# Altium PCB 82230KPC-1-K-1V0-241216.PcbDoc (part 2 of 2)
Units mm, origin at the board's own origin, x right, y up, seen from the top; angles counter-clockwise.
Board outline 63.4 x 81.4 mm, 2 copper layers (Top Layer, Bottom Layer); 105 components, 68 nets, 293 pads, 137 vias.
Unrouted connection lines stored in the file: 29.
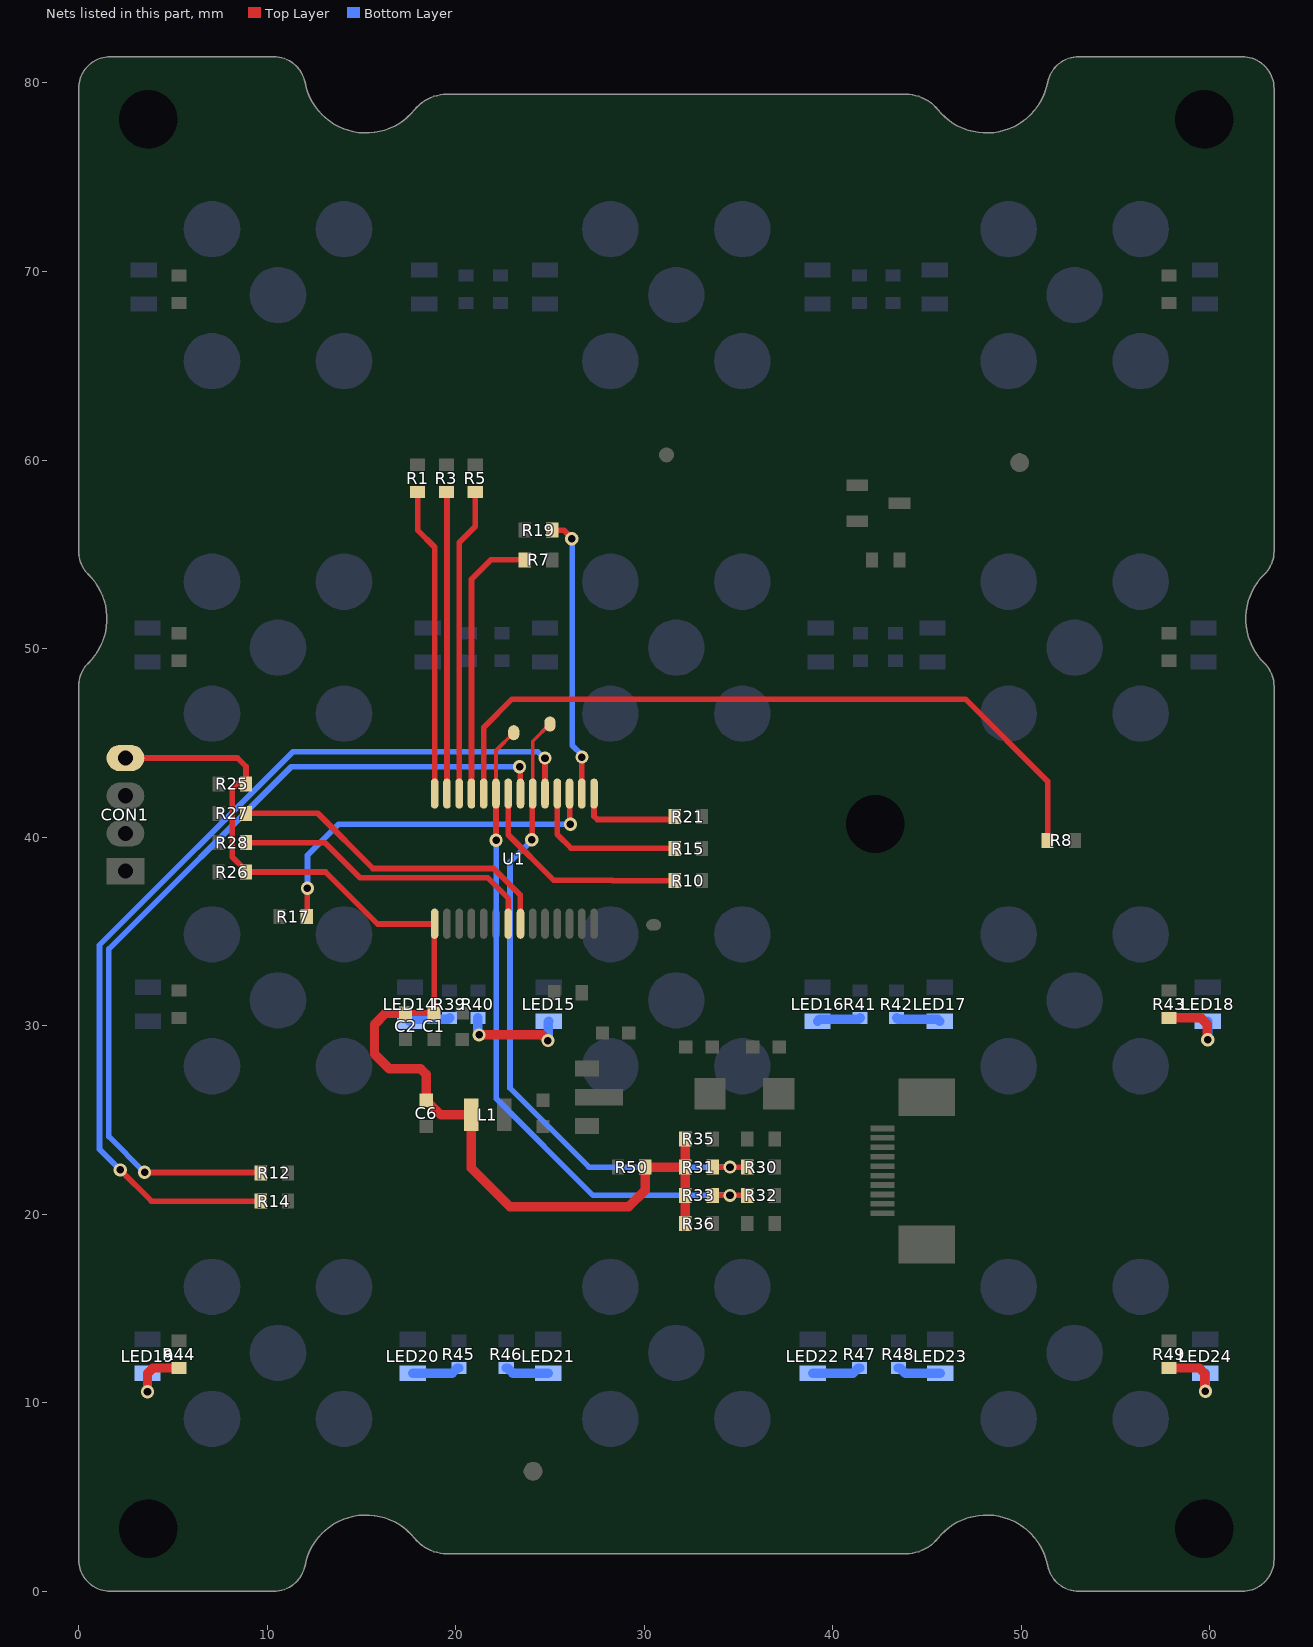
[diagram p2: the nets of this part, all layers, seen from the top]

## Via types
v1: diameter 0.7, hole 0.4, Top Layer to Bottom Layer, tented both sides, 137 vias

## Nets (pads, with @x,y where several pads share a name; then routed paths per layer and width w, separated by ;. In a path a pad name is that pad's centre, name@x,y a point inside that pad or via, vN(x,y) a via of type N, cw(c..) or ccw(c..) an arc to the next point about the centre after c; other vN are vias at no path point) (continued)
NetLED14_1: LED14.1 R39.1 | length 2.2
  Bottom Layer w0.5: LED14.1@17.574,30.24 17.674,30.34 19.601,30.34 R39.1@19.676,30.415
NetLED15_1: LED15.1 R40.1 | length 5.8
  Top Layer w0.5: v1(21.243,29.515) 24.584,29.515 v1(24.889,29.21)
  Bottom Layer w0.5: R40.1@21.177,30.415 21.177,29.581 v1(21.243,29.515) ; v1(24.889,29.21) 24.915,29.235 24.915,30.215 LED15.1@24.94,30.24
NetLED16_1: LED16.1 R41.1 | length 2.3
  Bottom Layer w0.5: LED16.1@39.189,30.24 39.3,30.351 41.386,30.351 R41.1@41.45,30.415
NetLED17_1: LED17.1 R42.1 | length 2.4
  Bottom Layer w0.5: R42.1@43.38,30.415 43.454,30.342 45.565,30.342 LED17.1@45.666,30.24
NetLED18_1: LED18.1 R43.1 | length 4
  Top Layer w0.5: R43.1@57.833,30.415 59.523,30.415 59.852,30.086 59.852,29.299 v1(59.89,29.261)
  Bottom Layer w0.5: v1(59.89,29.261) LED18.1@59.89,30.24
NetLED19_1: LED19.1 R44.1 | length 3.7
  Top Layer w0.5: v1(3.655,10.592) 3.655,11.555 3.948,11.848 R44.1@5.331,11.848
  Bottom Layer w0.5: v1(3.655,10.592) LED19.1@3.655,11.571
NetLED20_1: LED20.1 R45.1 | length 2.6
  Bottom Layer w0.5: LED20.1@17.726,11.571 19.813,11.571 20.09,11.848 R45.1@20.165,11.848
NetLED21_1: LED21.1 R46.1 | length 2.3
  Bottom Layer w0.5: R46.1@22.679,11.848 22.754,11.848 23.031,11.571 LED21.1@24.915,11.571
NetLED22_1: LED22.1 R47.1 | length 2.6
  Bottom Layer w0.5: LED22.1@38.935,11.571 41.073,11.571 41.35,11.848 R47.1@41.425,11.848
NetLED23_1: LED23.1 R48.1 | length 2.3
  Bottom Layer w0.5: R48.1@43.482,11.848 43.557,11.848 43.834,11.571 LED23.1@45.692,11.571
NetLED24_1: LED24.1 R49.1 | length 3.9
  Top Layer w0.5: R49.1@57.833,11.848 59.432,11.848 59.725,11.555 59.725,10.655 v1(59.763,10.617)
  Bottom Layer w0.5: v1(59.763,10.617) LED24.1@59.763,11.571
RX: R28.1 U1.7 | length 16.5
  Top Layer w0.3: R28.1@8.876,39.709 13.07,39.709 14.937,37.841 21.705,37.841 22.794,36.753 U1.7@22.794,35.419
SCL: pad.13 R32.1 R33.1 U1.23 | length 36.2
  Top Layer w0.2: U1.23@22.136,42.312 22.136,44.596 pad.13@23.08,45.54
  Top Layer w0.3: U1.23@22.136,42.312 22.141,42.308 22.141,39.845 v1(22.145,39.841) ; R33.1@33.627,21.002 v1(34.547,21.002) R32.1@35.467,21.002
  Bottom Layer w0.3: v1(22.145,39.841) 22.154,39.832 22.154,26.133 27.284,21.002 v1(34.547,21.002)
SDA: pad.12 R30.1 R31.1 U1.20 | length 35.4
  Top Layer w0.2: U1.20@24.086,42.312 24.086,45.086 pad.12@25,46
  Top Layer w0.3: v1(24.038,39.865) 24.067,39.894 24.067,42.293 U1.20@24.086,42.312 ; R31.1@33.627,22.503 v1(34.547,22.503) R30.1@35.467,22.503
  Bottom Layer w0.3: v1(24.038,39.865) 24.038,39.84 22.883,38.684 22.883,26.691 27.07,22.503 v1(34.547,22.503)
TK0: R1.1 U1.28 | length 16.4
  Top Layer w0.3: R1.1@17.98,58.305 17.98,56.286 18.886,55.381 U1.28@18.886,42.312
TK1: R3.1 U1.27 | length 16
  Top Layer w0.3: R3.1@19.434,58.305 19.536,58.202 U1.27@19.536,42.312
TK2: R5.1 U1.26 | length 16.3
  Top Layer w0.3: U1.26@20.186,42.312 20.186,55.622 21.039,56.475 R5.1@21.039,58.305
TK3: R7.1 U1.25 | length 14.6
  Top Layer w0.3: U1.25@20.836,42.312 20.836,53.681 21.867,54.712 R7.1@23.668,54.712
TK4: R8.1 U1.24 | length 39
  Top Layer w0.3: U1.24@21.486,42.312 21.486,45.822 22.984,47.32 47.038,47.32 51.393,42.965 R8.1@51.393,39.827
TK5: R10.1 U1.22 | length 12.1
  Top Layer w0.3: U1.22@22.786,42.312 22.786,40.127 25.205,37.708 28.317,37.708 28.331,37.694 R10.1@31.643,37.694
TK6: R12.1 U1.21 | length 46
  Top Layer w0.3: v1(3.502,22.225) 3.514,22.213 9.649,22.213 R12.1@9.661,22.201 ; v1(23.391,43.739) 23.417,43.712 23.417,42.331 U1.21@23.436,42.312
  Bottom Layer w0.3: v1(3.502,22.225) 1.607,24.12 1.607,34.071 11.275,43.739 v1(23.391,43.739)
TK7: R14.1 U1.19 | length 50.4
  Top Layer w0.3: v1(2.207,22.352) 3.858,20.701 R14.1@9.661,20.701 ; U1.19@24.736,42.312 v1(24.736,44.195)
  Bottom Layer w0.3: v1(2.207,22.352) 1.107,23.452 1.107,34.278 11.355,44.526 24.36,44.526 24.691,44.195 v1(24.736,44.195)
TK8: R15.1 U1.18 | length 8.7
  Top Layer w0.3: U1.18@25.386,42.312 25.386,40.143 26.108,39.421 R15.1@31.618,39.421
TK9: R17.1 U1.17 | length 19.5
  Top Layer w0.3: R17.1@12.101,35.789 12.12,35.807 12.12,37.269 v1(12.138,37.287) ; U1.17@26.036,42.312 26.055,42.293 26.055,40.718 v1(26.086,40.687)
  Bottom Layer w0.3: v1(12.138,37.287) 12.138,39.04 13.785,40.687 v1(26.086,40.687)
TK10: R19.1 U1.16 | length 15
  Top Layer w0.3: R19.1@25.118,56.286 25.727,56.286 26.159,55.855 v1(26.159,55.829) ; U1.16@26.686,42.312 26.686,44.24 v1(26.693,44.247)
  Bottom Layer w0.3: v1(26.159,55.829) 26.185,55.804 26.185,44.863 26.693,44.355 v1(26.693,44.247)
TK11: R21.1 U1.15 | length 5.6
  Top Layer w0.3: U1.15@27.336,42.312 27.336,41.112 27.512,40.936 31.457,40.936 R21.1@31.618,41.097
TX: R27.1 U1.8 | length 17.9
  Top Layer w0.3: R27.1@8.876,41.267 12.68,41.267 15.606,38.341 22.022,38.341 23.417,36.946 23.417,35.431 U1.8@23.436,35.412
VDDIO_3.3V: C1.1 C2.1 C6.1 CON1.4 L1.2 R25.1 R26.1 R31.2 R33.2 R35.2 R36.2 R50.2 U1.1 | length 62.3
  Top Layer w0.3: CON1.4@2.486,44.199 8.427,44.199 8.876,43.75 R25.1@8.876,42.824 8.85,42.85 8.43,42.85 8.151,42.57 8.151,38.951 8.876,38.226 R26.1@8.876,38.151 13.104,38.151 15.862,35.393 18.867,35.393 18.867,30.697 C1.1@18.842,30.672 C2.1@17.342,30.672
  Top Layer w0.5: C2.1@17.342,30.672 16.293,30.672 15.694,30.074 15.694,28.499 16.482,27.711 18.145,27.711 18.438,27.419 C6.1@18.438,26.049 19.208,25.279 L1.2@20.822,25.279 20.822,22.456 22.881,20.397 29.172,20.397 30.059,21.285 R50.2@30.059,22.503 R31.2@32.177,22.503 ; R36.2@32.177,19.502 R33.2@32.177,21.002 R31.2@32.177,22.503 ; R35.2@32.177,24.003 R31.2@32.177,22.503
pads on no net: J1.4 MARK1.1 MARK2.1 U1.4 U1.5 U1.9 U1.10 U1.11 U1.12

## Polygon pours and split planes (outlines as drawn)
GND on Top Layer "GND_L01_P000" (solid, remove dead copper, pour order 0): 63.399,0 0,0 0,81.4 63.4,81.4
GND on Bottom Layer "GND_L02_P001" (solid, remove dead copper, pour order 1): 63.399,0 0,0 0,81.4 63.4,81.4

## Keep-outs
Keep-Out Layer:
  lines w0.2: 0,1.634 ccw(c1.536,1.634) 0.45,0.548 ccw(c1.773,1.87) 1.773,0 9.496,0 10.583,0 ccw(c10.583,1.053) 11.327,0.309 11.789,0.771 ccw(c11.394,1.166) 11.953,1.166 cw(c14.196,1.166) 12.61,2.752 ; 0,1.7 0,47.57 0,48.203 ; 0,47.998 cw(c1.741,47.998) 0.51,49.229 0.697,49.417 ccw(c-1.217,51.331) 1.49,51.331 1.49,51.715 ccw(c-1.576,51.715) 0.592,53.883 0.482,53.993 cw(c1.646,55.157) 0,55.157 ; 0,55.174 0,79.751 ; 0,79.78 cw(c1.453,79.78) 0.426,80.807 cw(c1.856,79.377) 1.856,81.4 ; 0,83.034 ccw(c1.536,83.034) 0.45,81.948 ccw(c1.773,83.27) 1.773,81.4 ; 0,83.1 0,128.97 0,129.603 ; 0,129.398 cw(c1.741,129.398) 0.51,130.629 0.697,130.817 ccw(c-1.217,132.731) 1.49,132.731 1.49,133.115 ccw(c-1.576,133.115) 0.592,135.283 0.482,135.393 cw(c1.646,136.557) 0,136.557 ; 0,136.574 0,161.151 ; 0,161.293 cw(c1.18,161.293) 0.346,162.127 0.426,162.207 cw(c1.856,160.777) 1.856,162.8 ; 1.773,162.8 9.496,162.8 10.583,162.8 ; 10.319,81.4 cw(c10.319,79.651) 11.555,80.888 11.599,80.844 cw(c10.277,79.522) 12.147,79.522 ; 10.319,162.8 cw(c10.319,161.051) 11.555,162.288 11.599,162.244 cw(c10.277,160.922) 12.147,160.922 ; 12.135,79.732 ccw(c13.67,79.732) 12.585,78.647 12.982,78.25 ccw(c15.15,80.418) 15.15,77.352 15.304,77.352 ccw(c15.304,80.418) 17.472,78.25 17.927,78.705 cw(c19.604,77.028) 19.604,79.4 20.234,79.4 ; 12.135,161.132 ccw(c13.67,161.132) 12.585,160.047 12.982,159.65 ccw(c15.15,161.818) 15.15,158.752 15.304,158.752 ccw(c15.304,161.818) 17.472,159.65 17.927,160.105 cw(c19.604,158.428) 19.604,160.8 20.234,160.8 ; 12.644,2.786 12.61,2.752 ; 12.644,84.186 12.61,84.152 ; 20.145,79.4 43.887,79.4 cw(c43.887,77.246) 45.411,78.769 46.199,77.98 46.226,77.953 ccw(c47.549,79.276) 47.549,77.406 ; 20.145,160.8 43.887,160.8 cw(c43.887,158.646) 45.411,160.169 46.199,159.38 46.226,159.353 ccw(c47.549,160.676) 47.549,158.806 ; 47.596,77.403 48.325,77.403 ; 47.596,158.803 48.325,158.803 ; 48.277,77.406 ccw(c48.277,80.472) 50.445,78.304 50.845,78.703 ccw(c49.525,80.023) 51.392,80.023 cw(c52.37,80.023) 51.678,80.715 51.711,80.747 cw(c53.286,79.172) 53.286,81.4 ; 48.277,158.806 ccw(c48.277,161.872) 50.445,159.704 50.845,160.103 ccw(c49.525,161.423) 51.392,161.423 cw(c52.37,161.423) 51.678,162.115 51.711,162.147 cw(c53.286,160.572) 53.286,162.8 ; 51.334,1.623 ccw(c52.784,1.623) 51.898,0.476 ; 51.334,83.023 ccw(c52.784,83.023) 51.898,81.876 ; 51.355,1.377 ccw(c49.437,1.377) 50.794,2.733 50.322,3.204 ccw(c48.287,1.169) 48.287,4.047 47.981,4.047 ccw(c47.981,1.169) 45.946,3.204 45.133,2.391 cw(c45.102,2.422) 45.102,2.378 cw(c44.188,3.292) 44.188,2 19.798,2 cw(c19.798,4.8) 17.818,2.82 17.486,3.152 ccw(c15.318,0.984) 15.318,4.05 15.153,4.05 ccw(c15.153,0.984) 12.985,3.152 12.695,2.862 ccw(c12.738,2.819) 12.678,2.819 12.61,2.752 ; 51.355,82.777 ccw(c49.437,82.777) 50.794,84.133 50.322,84.604 ccw(c48.287,82.569) 48.287,85.447 47.981,85.447 ccw(c47.981,82.569) 45.946,84.604 45.133,83.791 cw(c45.102,83.822) 45.102,83.778 cw(c44.188,84.692) 44.188,83.4 19.798,83.4 cw(c19.798,86.2) 17.818,84.22 17.486,84.552 ccw(c15.318,82.384) 15.318,85.45 15.153,85.45 ccw(c15.153,82.384) 12.985,84.552 12.695,84.262 ccw(c12.738,84.219) 12.678,84.219 12.61,84.152 ; 51.891,0.467 ccw(c53.018,1.594) 53.018,0 61.695,0 ccw(c61.695,1.708) 62.903,0.5 ccw(c61.703,1.7) 63.4,1.7 63.4,47.57 63.4,48.203 ccw(c62.202,48.203) 63.049,49.05 ccw(c62.999,49.05) 63.035,49.085 62.798,49.321 cw(c64.966,51.489) 61.9,51.489 61.9,51.974 cw(c64.264,51.974) 62.592,53.645 ; 51.891,81.867 ccw(c53.018,82.994) 53.018,81.4 ; 53.018,162.8 61.695,162.8 ; 61.645,81.4 cw(c61.645,79.569) 62.939,80.864 cw(c61.827,79.751) 63.4,79.751 63.4,55.174 cw(c61.659,55.174) 62.89,53.943 62.592,53.645 ; 61.645,162.8 cw(c61.645,160.969) 62.939,162.264 cw(c61.827,161.151) 63.4,161.151 63.4,136.574 cw(c61.659,136.574) 62.89,135.343 62.592,135.045 ; 63.399,1.634 ccw(c64.935,1.634) 63.849,0.548 ccw(c65.171,1.87) 65.171,0 72.895,0 73.981,0 ccw(c73.981,1.053) 74.726,0.309 75.188,0.771 ccw(c74.793,1.166) 75.352,1.166 cw(c77.595,1.166) 76.009,2.752 ; 63.399,1.7 63.399,47.57 63.399,48.203 ; 63.399,47.998 cw(c65.14,47.998) 63.909,49.229 64.096,49.417 ccw(c62.182,51.331) 64.889,51.331 64.889,51.715 ccw(c61.823,51.715) 63.991,53.883 63.881,53.993 cw(c65.044,55.157) 63.399,55.157 ; 63.399,55.174 63.399,79.751 ; 63.399,79.893 cw(c64.578,79.893) 63.744,80.727 63.824,80.807 cw(c65.255,79.377) 65.255,81.4 ; 63.399,83.034 ccw(c64.935,83.034) 63.849,81.948 ccw(c65.171,83.27) 65.171,81.4 ; 63.399,83.1 63.399,128.97 63.399,129.603 ; 63.399,129.398 cw(c65.14,129.398) 63.909,130.629 64.096,130.817 ccw(c62.182,132.731) 64.889,132.731 64.889,133.115 ccw(c61.823,133.115) 63.991,135.283 63.881,135.393 cw(c65.044,136.557) 63.399,136.557 ; 63.399,136.574 63.399,161.151 ; 63.399,161.293 cw(c64.578,161.293) 63.744,162.127 63.824,162.207 cw(c65.255,160.777) 65.255,162.8 ; 65.171,162.8 72.895,162.8 73.981,162.8 ; 73.718,81.4 cw(c73.718,79.651) 74.954,80.888 74.998,80.844 cw(c73.676,79.522) 75.546,79.522 ; 73.718,162.8 cw(c73.718,161.051) 74.954,162.288 74.998,162.244 cw(c73.676,160.922) 75.546,160.922 ; 75.534,79.732 ccw(c77.069,79.732) 75.983,78.647 76.381,78.25 ccw(c78.549,80.418) 78.549,77.352 78.702,77.352 ccw(c78.702,80.418) 80.87,78.25 81.326,78.705 cw(c83.003,77.028) 83.003,79.4 83.633,79.4 ; 75.534,161.132 ccw(c77.069,161.132) 75.983,160.047 76.381,159.65 ccw(c78.549,161.818) 78.549,158.752 78.702,158.752 ccw(c78.702,161.818) 80.87,159.65 81.326,160.105 cw(c83.003,158.428) 83.003,160.8 83.633,160.8 ; 76.043,2.786 76.009,2.752 ; 76.043,84.186 76.009,84.152 ; 83.543,79.4 107.286,79.4 cw(c107.286,77.246) 108.809,78.769 109.598,77.98 109.625,77.953 ccw(c110.948,79.276) 110.948,77.406 ; 83.543,160.8 107.286,160.8 cw(c107.286,158.646) 108.809,160.169 109.598,159.38 109.625,159.353 ccw(c110.948,160.676) 110.948,158.806 ; 110.995,77.403 111.723,77.403 ; 110.995,158.803 111.723,158.803 ; 111.676,77.406 ccw(c111.676,80.472) 113.844,78.304 114.244,78.703 ccw(c112.924,80.023) 114.79,80.023 cw(c115.769,80.023) 115.077,80.715 115.109,80.747 cw(c116.685,79.172) 116.685,81.4 ; 111.676,158.806 ccw(c111.676,161.872) 113.844,159.704 114.244,160.103 ccw(c112.924,161.423) 114.79,161.423 cw(c115.769,161.423) 115.077,162.115 115.109,162.147 cw(c116.685,160.572) 116.685,162.8 ; 114.733,1.623 ccw(c116.183,1.623) 115.296,0.476 ; 114.733,83.023 ccw(c116.183,83.023) 115.296,81.876 ; 114.754,1.377 ccw(c112.836,1.377) 114.192,2.733 113.721,3.204 ccw(c111.686,1.169) 111.686,4.047 111.38,4.047 ccw(c111.38,1.169) 109.344,3.204 108.531,2.391 cw(c108.501,2.422) 108.501,2.378 cw(c107.587,3.292) 107.587,2 83.197,2 cw(c83.197,4.8) 81.217,2.82 80.885,3.152 ccw(c78.717,0.984) 78.717,4.05 78.552,4.05 ccw(c78.552,0.984) 76.384,3.152 76.094,2.862 ccw(c76.137,2.819) 76.076,2.819 76.009,2.752 ; 114.754,82.777 ccw(c112.836,82.777) 114.192,84.133 113.721,84.604 ccw(c111.686,82.569) 111.686,85.447 111.38,85.447 ccw(c111.38,82.569) 109.344,84.604 108.531,83.791 cw(c108.501,83.822) 108.501,83.778 cw(c107.587,84.692) 107.587,83.4 83.197,83.4 cw(c83.197,86.2) 81.217,84.22 80.885,84.552 ccw(c78.717,82.384) 78.717,85.45 78.552,85.45 ccw(c78.552,82.384) 76.384,84.552 76.094,84.262 ccw(c76.137,84.219) 76.076,84.219 76.009,84.152 ; 115.289,0.467 ccw(c116.416,1.594) 116.416,0 125.094,0 ccw(c125.094,1.708) 126.302,0.5 ccw(c125.102,1.7) 126.799,1.7 ; 115.289,81.867 ccw(c116.416,82.994) 116.416,81.4 ; 116.416,162.8 125.094,162.8 ; 125.043,81.4 cw(c125.043,79.569) 126.338,80.864 cw(c125.226,79.751) 126.799,79.751 ; 125.043,162.8 cw(c125.043,160.969) 126.338,162.264 cw(c125.226,161.151) 126.799,161.151 ; 126.799,1.634 ccw(c128.335,1.634) 127.249,0.548 ccw(c128.571,1.87) 128.571,0 136.295,0 137.381,0 ccw(c137.381,1.053) 138.126,0.309 138.588,0.771 ccw(c138.193,1.166) 138.752,1.166 cw(c140.995,1.166) 139.409,2.752 ; 126.799,47.998 cw(c128.54,47.998) 127.309,49.229 127.496,49.417 ccw(c125.582,51.331) 128.289,51.331 128.289,51.715 ccw(c125.223,51.715) 127.391,53.883 127.281,53.993 cw(c128.444,55.157) 126.799,55.157 ; 126.799,79.893 cw(c127.978,79.893) 127.144,80.727 127.224,80.807 cw(c128.655,79.377) 128.655,81.4 ; 126.799,83.034 ccw(c128.335,83.034) 127.249,81.948 ccw(c128.571,83.27) 128.571,81.4 ; 126.799,129.398 cw(c128.54,129.398) 127.309,130.629 127.496,130.817 ccw(c125.582,132.731) 128.289,132.731 128.289,133.115 ccw(c125.223,133.115) 127.391,135.283 127.281,135.393 cw(c128.444,136.557) 126.799,136.557 ; 126.799,161.293 cw(c127.978,161.293) 127.144,162.127 127.224,162.207 cw(c128.655,160.777) 128.655,162.8 ; 128.571,162.8 136.295,162.8 137.381,162.8 ; 137.118,81.4 cw(c137.118,79.651) 138.354,80.888 138.398,80.844 cw(c137.076,79.522) 138.946,79.522 ; 137.118,162.8 cw(c137.118,161.051) 138.354,162.288 138.398,162.244 cw(c137.076,160.922) 138.946,160.922 ; 138.934,79.732 ccw(c140.469,79.732) 139.383,78.647 139.781,78.25 ccw(c141.949,80.418) 141.949,77.352 142.102,77.352 ccw(c142.102,80.418) 144.27,78.25 144.726,78.705 cw(c146.403,77.028) 146.403,79.4 147.033,79.4 ; 138.934,161.132 ccw(c140.469,161.132) 139.383,160.047 139.781,159.65 ccw(c141.949,161.818) 141.949,158.752 142.102,158.752 ccw(c142.102,161.818) 144.27,159.65 144.726,160.105 cw(c146.403,158.428) 146.403,160.8 147.033,160.8 ; 139.443,2.786 139.409,2.752 ; 139.443,84.186 139.409,84.152 ; 146.943,79.4 170.686,79.4 cw(c170.686,77.246) 172.209,78.769 172.998,77.98 173.025,77.953 ccw(c174.348,79.276) 174.348,77.406 ; 146.943,160.8 170.686,160.8 cw(c170.686,158.646) 172.209,160.169 172.998,159.38 173.025,159.353 ccw(c174.348,160.676) 174.348,158.806 ; 174.395,77.403 175.123,77.403 ; 174.395,158.803 175.123,158.803 ; 175.076,77.406 ccw(c175.076,80.472) 177.244,78.304 177.644,78.703 ccw(c176.324,80.023) 178.19,80.023 cw(c179.169,80.023) 178.477,80.715 178.509,80.747 cw(c180.085,79.172) 180.085,81.4 ; 175.076,158.806 ccw(c175.076,161.872) 177.244,159.704 177.644,160.103 ccw(c176.324,161.423) 178.19,161.423 cw(c179.169,161.423) 178.477,162.115 178.509,162.147 cw(c180.085,160.572) 180.085,162.8 ; 178.133,1.623 ccw(c179.583,1.623) 178.696,0.476 ; 178.133,83.023 ccw(c179.583,83.023) 178.696,81.876 ; 178.154,1.377 ccw(c176.236,1.377) 177.592,2.733 177.121,3.204 ccw(c175.086,1.169) 175.086,4.047 174.78,4.047 ccw(c174.78,1.169) 172.744,3.204 171.931,2.391 cw(c171.901,2.422) 171.901,2.378 cw(c170.987,3.292) 170.987,2 146.597,2 cw(c146.597,4.8) 144.617,2.82 144.285,3.152 ccw(c142.117,0.984) 142.117,4.05 141.952,4.05 ccw(c141.952,0.984) 139.784,3.152 139.494,2.862 ccw(c139.537,2.819) 139.476,2.819 139.409,2.752 ; 178.154,82.777 ccw(c176.236,82.777) 177.592,84.133 177.121,84.604 ccw(c175.086,82.569) 175.086,85.447 174.78,85.447 ccw(c174.78,82.569) 172.744,84.604 171.931,83.791 cw(c171.901,83.822) 171.901,83.778 cw(c170.987,84.692) 170.987,83.4 146.597,83.4 cw(c146.597,86.2) 144.617,84.22 144.285,84.552 ccw(c142.117,82.384) 142.117,85.45 141.952,85.45 ccw(c141.952,82.384) 139.784,84.552 139.494,84.262 ccw(c139.537,84.219) 139.476,84.219 139.409,84.152 ; 178.689,0.467 ccw(c179.816,1.594) 179.816,0 188.494,0 ccw(c188.494,1.708) 189.702,0.5 ccw(c188.502,1.7) 190.199,1.7 190.199,47.57 190.199,48.203 ccw(c189.001,48.203) 189.848,49.05 ccw(c189.798,49.05) 189.833,49.085 189.597,49.321 cw(c191.765,51.489) 188.699,51.489 188.699,51.974 cw(c191.062,51.974) 189.391,53.645 ; 178.689,81.867 ccw(c179.816,82.994) 179.816,81.4 ; 179.816,162.8 188.494,162.8 ; 188.443,81.4 cw(c188.443,79.569) 189.738,80.864 cw(c188.626,79.751) 190.199,79.751 190.199,55.174 cw(c188.457,55.174) 189.689,53.943 189.391,53.645 ; 188.443,162.8 cw(c188.443,160.969) 189.738,162.264 cw(c188.626,161.151) 190.199,161.151 190.199,136.574 cw(c188.457,136.574) 189.689,135.343 189.391,135.045 ; 1.773,81.4 9.496,81.4 ; 1.773,81.4 9.496,81.4 ; 9.496,81.4 10.583,81.4 ; 9.496,81.4 10.583,81.4 ; 10.583,81.4 ccw(c10.583,82.453) 11.327,81.709 11.789,82.171 ccw(c11.394,82.566) 11.953,82.566 cw(c14.196,82.566) 12.61,84.152 ; 53.018,81.4 61.695,81.4 ; 53.018,81.4 61.695,81.4 ; 61.695,81.4 ccw(c61.695,83.108) 62.903,81.9 ccw(c61.703,83.1) 63.4,83.1 63.4,128.97 63.4,129.603 ccw(c62.202,129.603) 63.049,130.45 ccw(c62.999,130.45) 63.035,130.485 62.798,130.721 cw(c64.966,132.889) 61.9,132.889 61.9,133.374 cw(c64.264,133.374) 62.592,135.045 ; 62.592,53.645 62.592,53.645 ; 62.592,135.045 62.592,135.045 ; 65.171,81.4 72.895,81.4 ; 65.171,81.4 72.895,81.4 ; 72.895,81.4 73.981,81.4 ; 72.895,81.4 73.981,81.4 ; 73.981,81.4 ccw(c73.981,82.453) 74.726,81.709 75.188,82.171 ccw(c74.793,82.566) 75.352,82.566 cw(c77.595,82.566) 76.009,84.152 ; 116.416,81.4 125.094,81.4 ; 116.416,81.4 125.094,81.4 ; 125.094,81.4 ccw(c125.094,83.108) 126.302,81.9 ccw(c125.102,83.1) 126.799,83.1 ; 125.991,53.645 ccw(c127.662,51.974) 125.299,51.974 125.299,51.489 ccw(c128.365,51.489) 126.197,49.321 126.433,49.085 cw(c126.398,49.05) 126.448,49.05 cw(c125.601,48.203) 126.799,48.203 ; 125.991,53.645 126.289,53.943 ccw(c125.057,55.174) 126.799,55.174 ; 125.991,53.645 125.991,53.645 ; 125.991,135.045 ccw(c127.662,133.374) 125.299,133.374 125.299,132.889 ccw(c128.365,132.889) 126.197,130.721 126.433,130.485 cw(c126.398,130.45) 126.448,130.45 cw(c125.601,129.603) 126.799,129.603 ; 125.991,135.045 125.991,135.045 ; 125.991,135.045 126.289,135.343 ccw(c125.057,136.574) 126.799,136.574 ; 126.799,1.7 126.799,47.57 ; 126.799,1.7 126.799,47.57 ; 126.799,47.57 126.799,48.203 ; 126.799,47.57 126.799,48.203 ; 126.799,55.174 126.799,79.751 ; 126.799,55.174 126.799,79.751 ; 126.799,83.1 126.799,128.97 ; 126.799,83.1 126.799,128.97 ; 126.799,128.97 126.799,129.603 ; 126.799,128.97 126.799,129.603 ; 126.799,136.574 126.799,161.151 ; 126.799,136.574 126.799,161.151 ; 128.571,81.4 136.295,81.4 ; 128.571,81.4 136.295,81.4 ; 136.295,81.4 137.381,81.4 ; 136.295,81.4 137.381,81.4 ; 137.381,81.4 ccw(c137.381,82.453) 138.126,81.709 138.588,82.171 ccw(c138.193,82.566) 138.752,82.566 cw(c140.995,82.566) 139.409,84.152 ; 179.816,81.4 188.494,81.4 ; 179.816,81.4 188.494,81.4 ; 188.494,81.4 ccw(c188.494,83.108) 189.702,81.9 ccw(c188.502,83.1) 190.199,83.1 190.199,128.97 190.199,129.603 ccw(c189.001,129.603) 189.848,130.45 ccw(c189.798,130.45) 189.833,130.485 189.597,130.721 cw(c191.765,132.889) 188.699,132.889 188.699,133.374 cw(c191.062,133.374) 189.391,135.045 ; 189.391,53.645 189.391,53.645 ; 189.391,135.045 189.391,135.045

## Other copper
Top Layer:
  pour cut-out: 11.476,36.489 11.276,36.489 11.276,36.316 11.276,36.315 11.48,36.315
Bottom Layer:
  pour cut-out: 17.345,70.206 17.345,68.377 17.523,68.199 25.524,68.199 25.727,68.402 25.727,69.825 25.321,70.231 25.169,70.231

## Silkscreen, mask and mechanical layers (free items; w line width, h text height)
Top Overlay:
  circle w0.254: c59.7,78.086 r2
  circle w0.254: c3.7,78.086 r2
  circle w0.254: c42.262,40.7 r2
  circle w0.254: c59.7,3.314 r2
  circle w0.254: c3.7,3.314 r2
  text "G" at 30.9,61.22 h0.7
  text "SCL" at 21.03,46.46 h0.7
  text "SDA" at 26.03,45.74 h0.7
  text "G" at 4.41,41.94 h0.7
  text "T" at 4.41,39.95 h0.7
  text "R" at 4.41,37.66 h0.7
  text "INT" at 31.9,35.01 h0.7
  text "3V3" at 0.643,34.834 h0.7
  text "G" at 1.1,33.582 h0.7
  text "T" at 1.1,32.35 h0.7
  text "R" at 1.1,31.19 h0.7
Mechanical 12:
  drawing of 178 lines, arcs and shapes, not listed
Mechanical 14:
  circle w0.013: c59.7,3.314 r1.55
  circle w0.013: c59.7,78.086 r1.55
  circle w0.013: c3.7,3.314 r1.55
  circle w0.013: c3.7,78.086 r1.55
  circle w0.013: c42.262,40.7 r1.55
  circle w0.013: c42.262,40.7 r3.25
  circle w0.013: c3.7,3.314 r3.25
  circle w0.013: c3.7,78.086 r3.25
  circle w0.013: c59.7,3.314 r3.25
  circle w0.013: c59.7,78.086 r3.25
  lines w0.013: 3,40.336 3,24.136 8.4,24.136 ; 3.808,40.336 9.208,40.336 9.208,24.136 ; 0,1.7 ccw(c1.7,1.7) 1.7,0 10.339,0 ccw(c10.339,1.7) 12.008,1.377 cw(c15.248,0.75) 17.818,2.82 ccw(c19.532,4.2) 19.532,2 43.868,2 ccw(c43.868,4.2) 45.582,2.82 cw(c48.152,0.75) 51.392,1.377 ccw(c53.061,1.7) 53.061,0 61.7,0 ccw(c61.7,1.7) 63.4,1.7 63.4,48.015 ccw(c61.7,48.015) 62.89,49.229 cw(c65.2,51.586) 62.89,53.943 ccw(c61.7,55.157) 63.4,55.157 63.4,79.7 ccw(c61.7,79.7) 61.7,81.4 53.061,81.4 ccw(c53.061,79.7) 51.392,80.023 cw(c48.152,80.65) 45.582,78.58 ccw(c43.868,77.2) 43.868,79.4 19.532,79.4 ccw(c19.532,77.2) 17.818,78.58 cw(c15.248,80.65) 12.008,80.023 ccw(c10.339,79.7) 10.339,81.4 1.7,81.4 ccw(c1.7,79.7) 0,79.7 0,55.157 ccw(c1.7,55.157) 0.51,53.943 cw(c-1.8,51.586) 0.51,49.229 ccw(c1.7,48.015) 0,48.015 0,1.7
Mechanical 16:
  drawing of 79 lines, arcs and shapes, not listed
  text "1" at 22.395,173.101 h1.78
  text "2" at 95.039,173.101 h1.78
  text "3" at 168.191,173.101 h1.78
  text "4" at 241.089,173.101 h1.78
  text "PCB加工工艺说明" at 228.949,168.151 h3.5
  text "1、数量" at 206.449,163.657 h3.5
  text "2" at 241.946,159.84 h3.5
  text "2、层数" at 206.446,159.657 h3.5
  text "3、尺寸" at 206.446,156.17 h3.5
  text "162.80" at 237.778,156.072 h1.52
  text "190.20" at 221.065,155.97 h1.52
  text "2*3" at 253.958,155.97 h1.52
  text "拼板" at 258.609,155.869 h3.5
  text "mm X       mm" at 229.937,155.314 h3.5
  text "4、板厚" at 206.449,152.67 h3.5
  text "1.6mm" at 237.949,152.379 h3.5
  text "A" at -11.946,150.089 h1.78
  text "A" at 275.074,150.089 h1.78
  text "5、材料" at 206.449,149.17 h3.5
  text "FR4" at 238.949,148.84 h3.5
  text "外层" at 234.953,145.657 h3.5
  text "内层" at 255.453,145.657 h3.5
  text "NC" at 264.949,145.418 h3.5
  text "1OZ" at 244.449,145.379 h3.5
  text "6、铜箔厚度" at 206.449,145.157 h3.5
  text "双面" at 229.453,141.952 h3.5
  text "绿色" at 246.449,141.952 h3.5
  text "7、阻焊" at 206.449,141.657 h3.5
  text "8、字符" at 206.449,138.657 h3.5
  text "白色" at 246.953,138.403 h3.5
  text "双面" at 229.953,138.135 h3.5
  text "9、过孔处理" at 206.449,135.135 h3.5
  text "盖油" at 240.453,135.086 h3.5
  text "10、表面处理" at 205.949,131.635 h3.5
  text "喷锡" at 233.453,131.449 h3.5
  text "化学沉金" at 251.964,131.419 h3.5
  text "防氧化" at 231.449,127.67 h3.5
  text "11、测试" at 205.949,124.635 h3.5
  text "是" at 241.453,124.596 h3.5
  text "12、环保要求          无铅" at 205.783,120.98 h3.5
  text "13、尺寸要求    外形尺寸公差：±0.1mm" at 205.783,117.424 h3.5
  text "孔径公差：+0.13mm/-0.08mm" at 227.817,113.657 h3.5
  text "14、交货日期" at 205.885,110.617 h3.5
  text "B" at -11.946,102.032 h1.78
  text "B" at 275.074,102.032 h1.78
  text "C" at -11.946,53.518 h1.78
  text "C" at 275.074,53.518 h1.78
  text "珠海博科电子科技" at 231.823,10.088 h5
  text "D" at 275.074,5.512 h1.78
  text "DATE:" at 252.113,1.88 h1.14
  text "FILE NAME:" at 199.408,1.549 h1.14
  text ".PCB_FILE_NAME_NO_PATH" at 205.063,-1.687 h1.78
  text ".PRINT_DATE" at 257.117,-1.905 h1.78
  text "电话" at 251.427,-6.957 h3.5
  text "联系人" at 199.64,-7.745 h3.5
  text "梁雄伟" at 223.16,-8.166 h3.5
  text "15626987331" at 253.51,-10.502 h3.5
  text "1" at 14.537,-14.845 h1.78
  text "2" at 95.039,-14.859 h1.78
  text "3" at 168.191,-14.859 h1.78
  text "4" at 241.089,-14.859 h1.78

## Dimensions
0,0 to 1.773,162.8 on Drill Drawing
0,0 to 190.199,1.7 on Drill Drawing

## Text inside footprints (layer, text, board x,y; h text height)
PCB1: Top Overlay "82230KPC-1-K-1V0-241216" at 12.78,64.697 h1.7